# Altium PCB CONN-SMD_91302-32-067RDM.pcbdoc
Units mm, origin at the board's own origin, x right, y up, seen from the top; angles counter-clockwise.
Board outline 34.64 x 22.02 mm, 2 copper layers (Top Layer, Bottom Layer); 1 components, 0 nets, 69 pads, 0 vias.
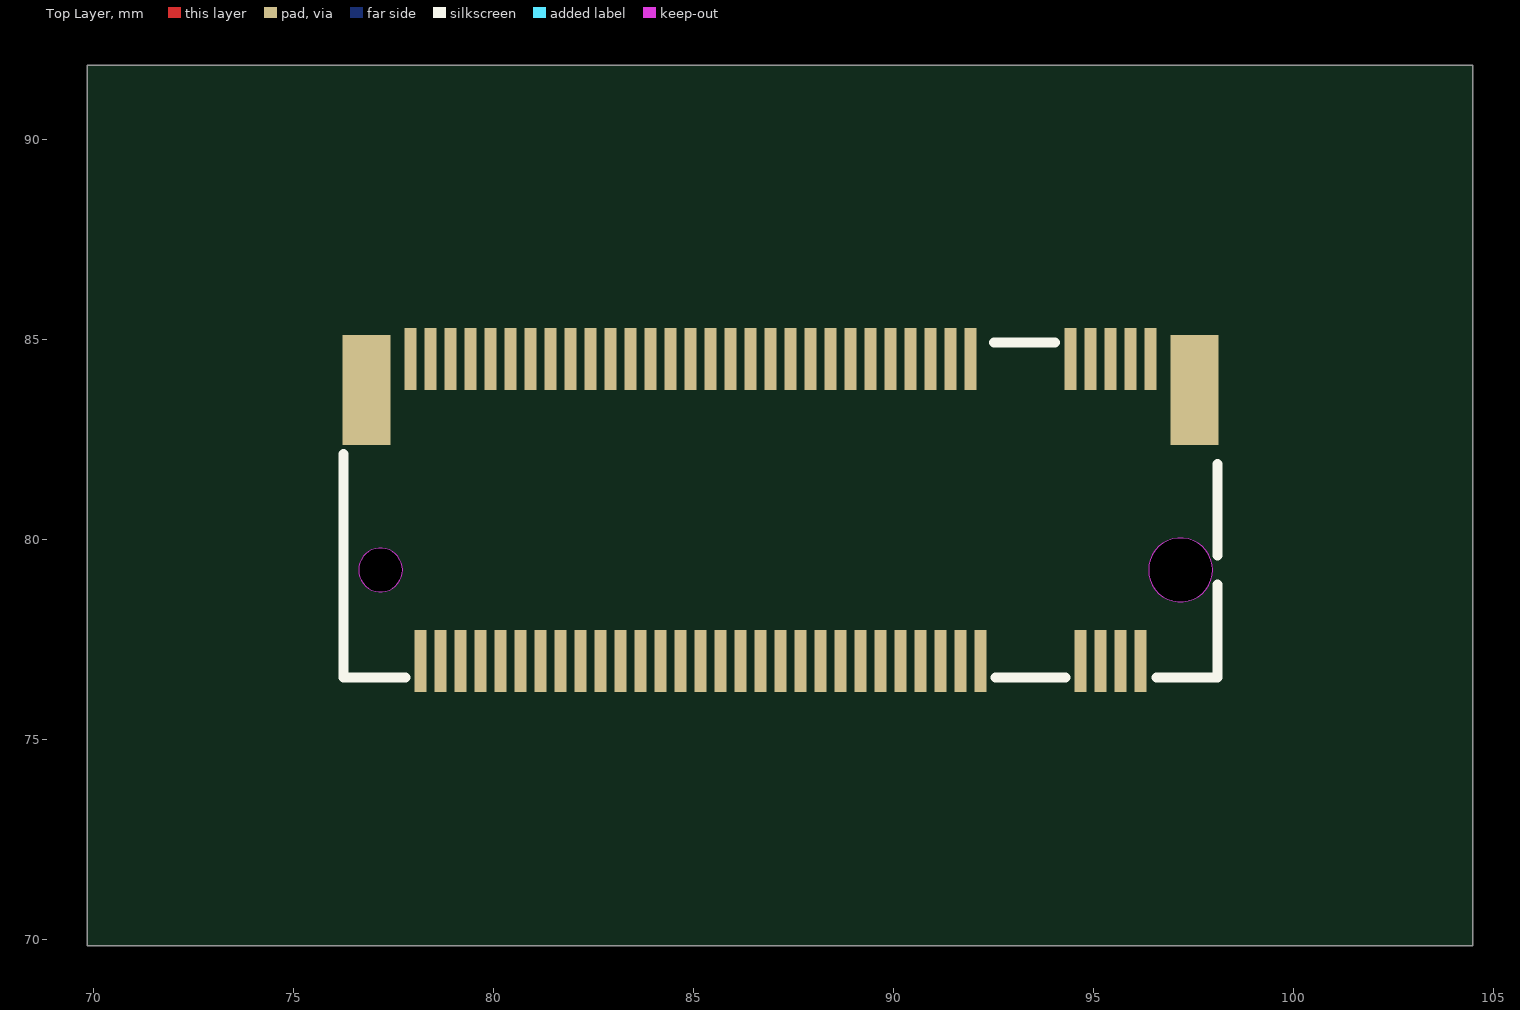
[diagram p0: Top Layer view]
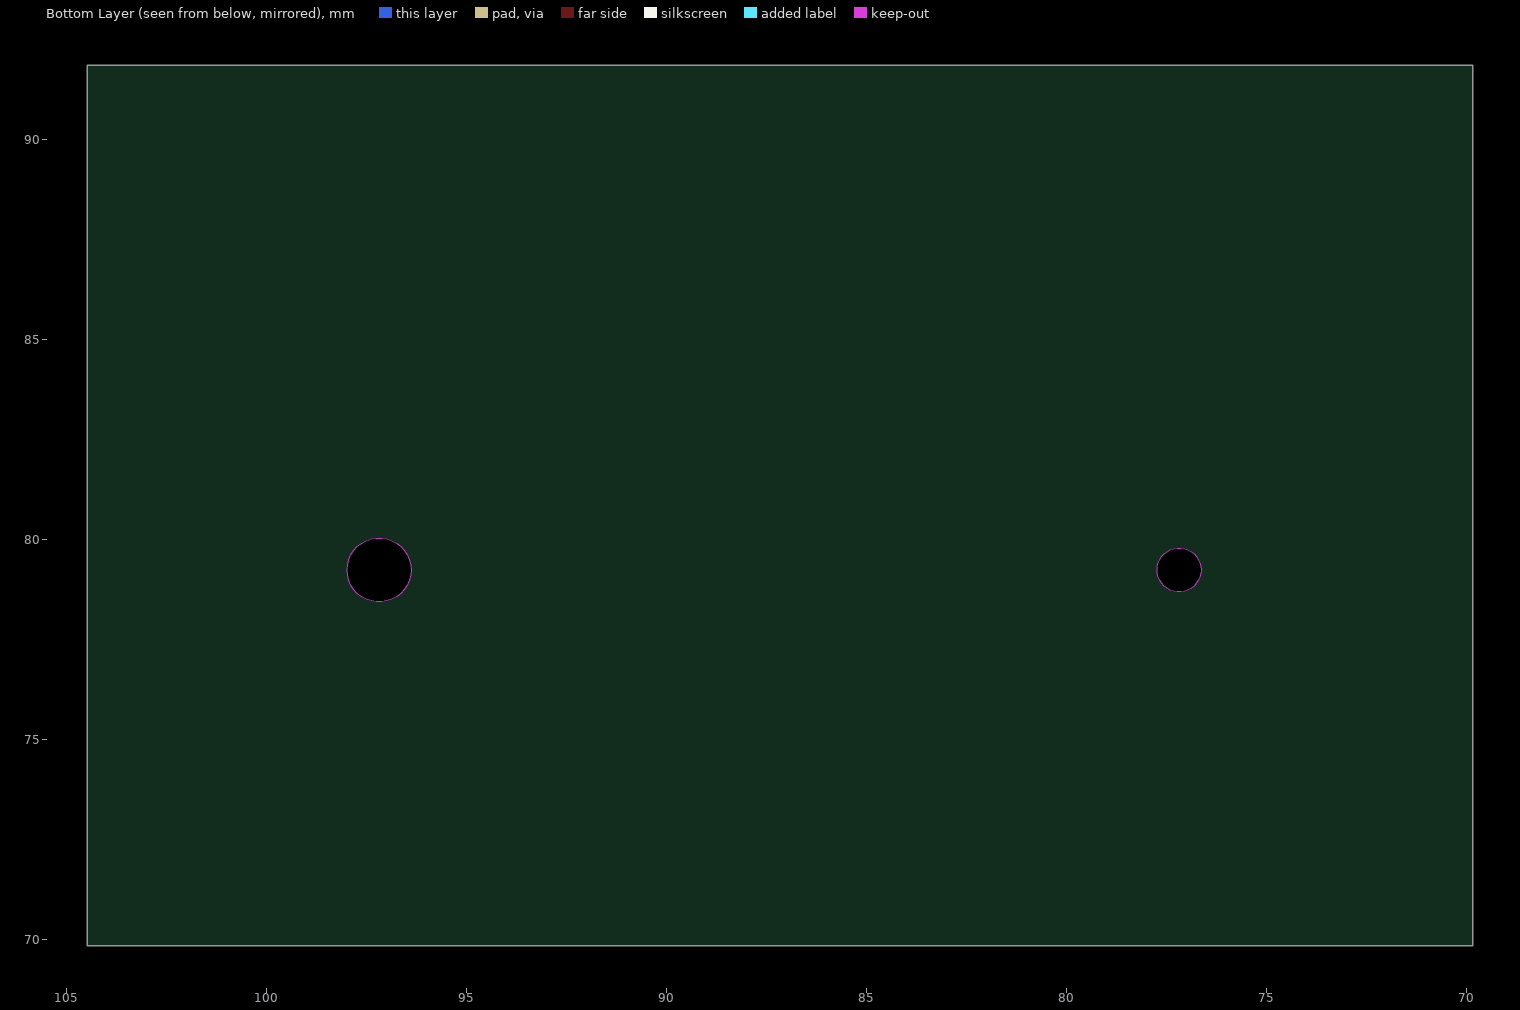
[diagram p1: Bottom Layer view, seen from below]

## Layer stack, top to bottom
Top Layer: signal copper (thickness not stored)
Dielectric: dielectric 0.32, FR-4, Dk 4.8
Bottom Layer: signal copper (thickness not stored)

## Board outline
104.485,69.85 69.85,69.85 69.85,91.872 104.485,91.872

## Components (designator, comment, footprint, x,y, rotation, side; value= is the part's Value field where it differs from the comment)
? "CONN-SMD_91302-32-067RDM" CONN-SMD_91302-32-067RDM 87.185,80.75 r0 top

## Footprints (in the part's own frame and the unit in brackets; to place one, negate y for a bottom-side part, rotate by r counter-clockwise, add the part's x,y. Pads: shape width x height; smd on the part's side, far side on the other; paste and mask are expansions set on the pad)
CONN-SMD_91302-32-067RDM [mm]
  rect 0.3x1.55 smd: 1(-9.25,3.775) 2(-9,-3.775) 3(-8.75,3.775) 4(-8.5,-3.775) 5(-8.25,3.775) 6(-8,-3.775) 7(-7.75,3.775) 8(-7.5,-3.775) 9(-7.25,3.775) 10(-7,-3.775) 11(-6.75,3.775) 12(-6.5,-3.775) 13(-6.25,3.775) 14(-6,-3.775) 15(-5.75,3.775) 16(-5.5,-3.775) 17(-5.25,3.775) 18(-5,-3.775) 19(-4.75,3.775) 20(-4.5,-3.775) 21(-4.25,3.775) 22(-4,-3.775) 23(-3.75,3.775) 24(-3.5,-3.775) 25(-3.25,3.775) 26(-3,-3.775) 27(-2.75,3.775) 28(-2.5,-3.775) 29(-2.25,3.775) 30(-2,-3.775) 31(-1.75,3.775) 32(-1.5,-3.775) 33(-1.25,3.775) 34(-1,-3.775) 35(-0.75,3.775) 36(-0.5,-3.775) 37(-0.25,3.775) 38(0,-3.775) 39(0.25,3.775) 40(0.5,-3.775) 41(0.75,3.775) 42(1,-3.775) 43(1.25,3.775) 44(1.5,-3.775) 45(1.75,3.775) 46(2,-3.775) 47(2.25,3.775) 48(2.5,-3.775) 49(2.75,3.775) 50(3,-3.775) 51(3.25,3.775) 52(3.5,-3.775) 53(3.75,3.775) 54(4,-3.775) 55(4.25,3.775) 56(4.5,-3.775) 57(4.75,3.775) 58(5,-3.775) 67(7.25,3.775) 68(7.5,-3.775) 69(7.75,3.775) 70(8,-3.775) 71(8.25,3.775) 72(8.5,-3.775) 73(8.75,3.775) 74(9,-3.775) 75(9.25,3.775)
  rect 1.2x2.75 smd: 76(-10.35,3) 76(10.35,3)
  Multi-Layer board cut-out: -9.45,-1.5 -9.504,-1.262 -9.657,-1.07 -9.878,-0.964 -10.122,-0.964 -10.343,-1.07 -10.496,-1.262 -10.55,-1.5 -10.55,-1.5 -10.496,-1.739 -10.343,-1.93 -10.122,-2.036 -9.878,-2.036 -9.657,-1.93 -9.504,-1.739 -9.45,-1.5
  Multi-Layer board cut-out: 10.8,-1.5 10.721,-1.153 10.499,-0.874 10.178,-0.72 9.822,-0.72 9.501,-0.874 9.279,-1.153 9.2,-1.5 9.2,-1.5 9.279,-1.847 9.501,-2.125 9.822,-2.28 10.178,-2.28 10.499,-2.125 10.721,-1.847 10.8,-1.5
  Multi-Layer keep-out region: -9.45,-1.5 -9.504,-1.262 -9.657,-1.07 -9.878,-0.964 -10.122,-0.964 -10.343,-1.07 -10.496,-1.262 -10.55,-1.5 -10.55,-1.5 -10.496,-1.739 -10.343,-1.93 -10.122,-2.036 -9.878,-2.036 -9.657,-1.93 -9.504,-1.739 -9.45,-1.5
  Multi-Layer keep-out region: 10.8,-1.5 10.721,-1.153 10.499,-0.874 10.178,-0.72 9.822,-0.72 9.501,-0.874 9.279,-1.153 9.2,-1.5 9.2,-1.5 9.279,-1.847 9.501,-2.125 9.822,-2.28 10.178,-2.28 10.499,-2.125 10.721,-1.847 10.8,-1.5
  silkscreen extent -10.92,-4.19 10.92,4.19

## Nets (pads, with @x,y where several pads share a name; then routed paths per layer and width w, separated by ;. In a path a pad name is that pad's centre, name@x,y a point inside that pad or via, vN(x,y) a via of type N, cw(c..) or ccw(c..) an arc to the next point about the centre after c; other vN are vias at no path point)
pads on no net: ?.1 ?.2 ?.3 ?.4 ?.5 ?.6 ?.7 ?.8 ?.9 ?.10 ?.11 ?.12 ?.13 ?.14 ?.15 ?.16 ?.17 ?.18 ?.19 ?.20 ?.21 ?.22 ?.23 ?.24 ?.25 ?.26 ?.27 ?.28 ?.29 ?.30 ?.31 ?.32 ?.33 ?.34 ?.35 ?.36 ?.37 ?.38 ?.39 ?.40 ?.41 ?.42 ?.43 ?.44 ?.45 ?.46 ?.47 ?.48 ?.49 ?.50 ?.51 ?.52 ?.53 ?.54 ?.55 ?.56 ?.57 ?.58 ?.67 ?.68 ?.69 ?.70 ?.71 ?.72 ?.73 ?.74 ?.75 ?.76